# Altium PCB Sensor_Motor.PcbDoc
Units mm, origin at the board's own origin, x right, y up, seen from the top; angles counter-clockwise.
Board outline 45 x 45 mm, 2 copper layers (Top Layer, Bottom Layer); 35 components, 21 nets, 84 pads, 6 vias.
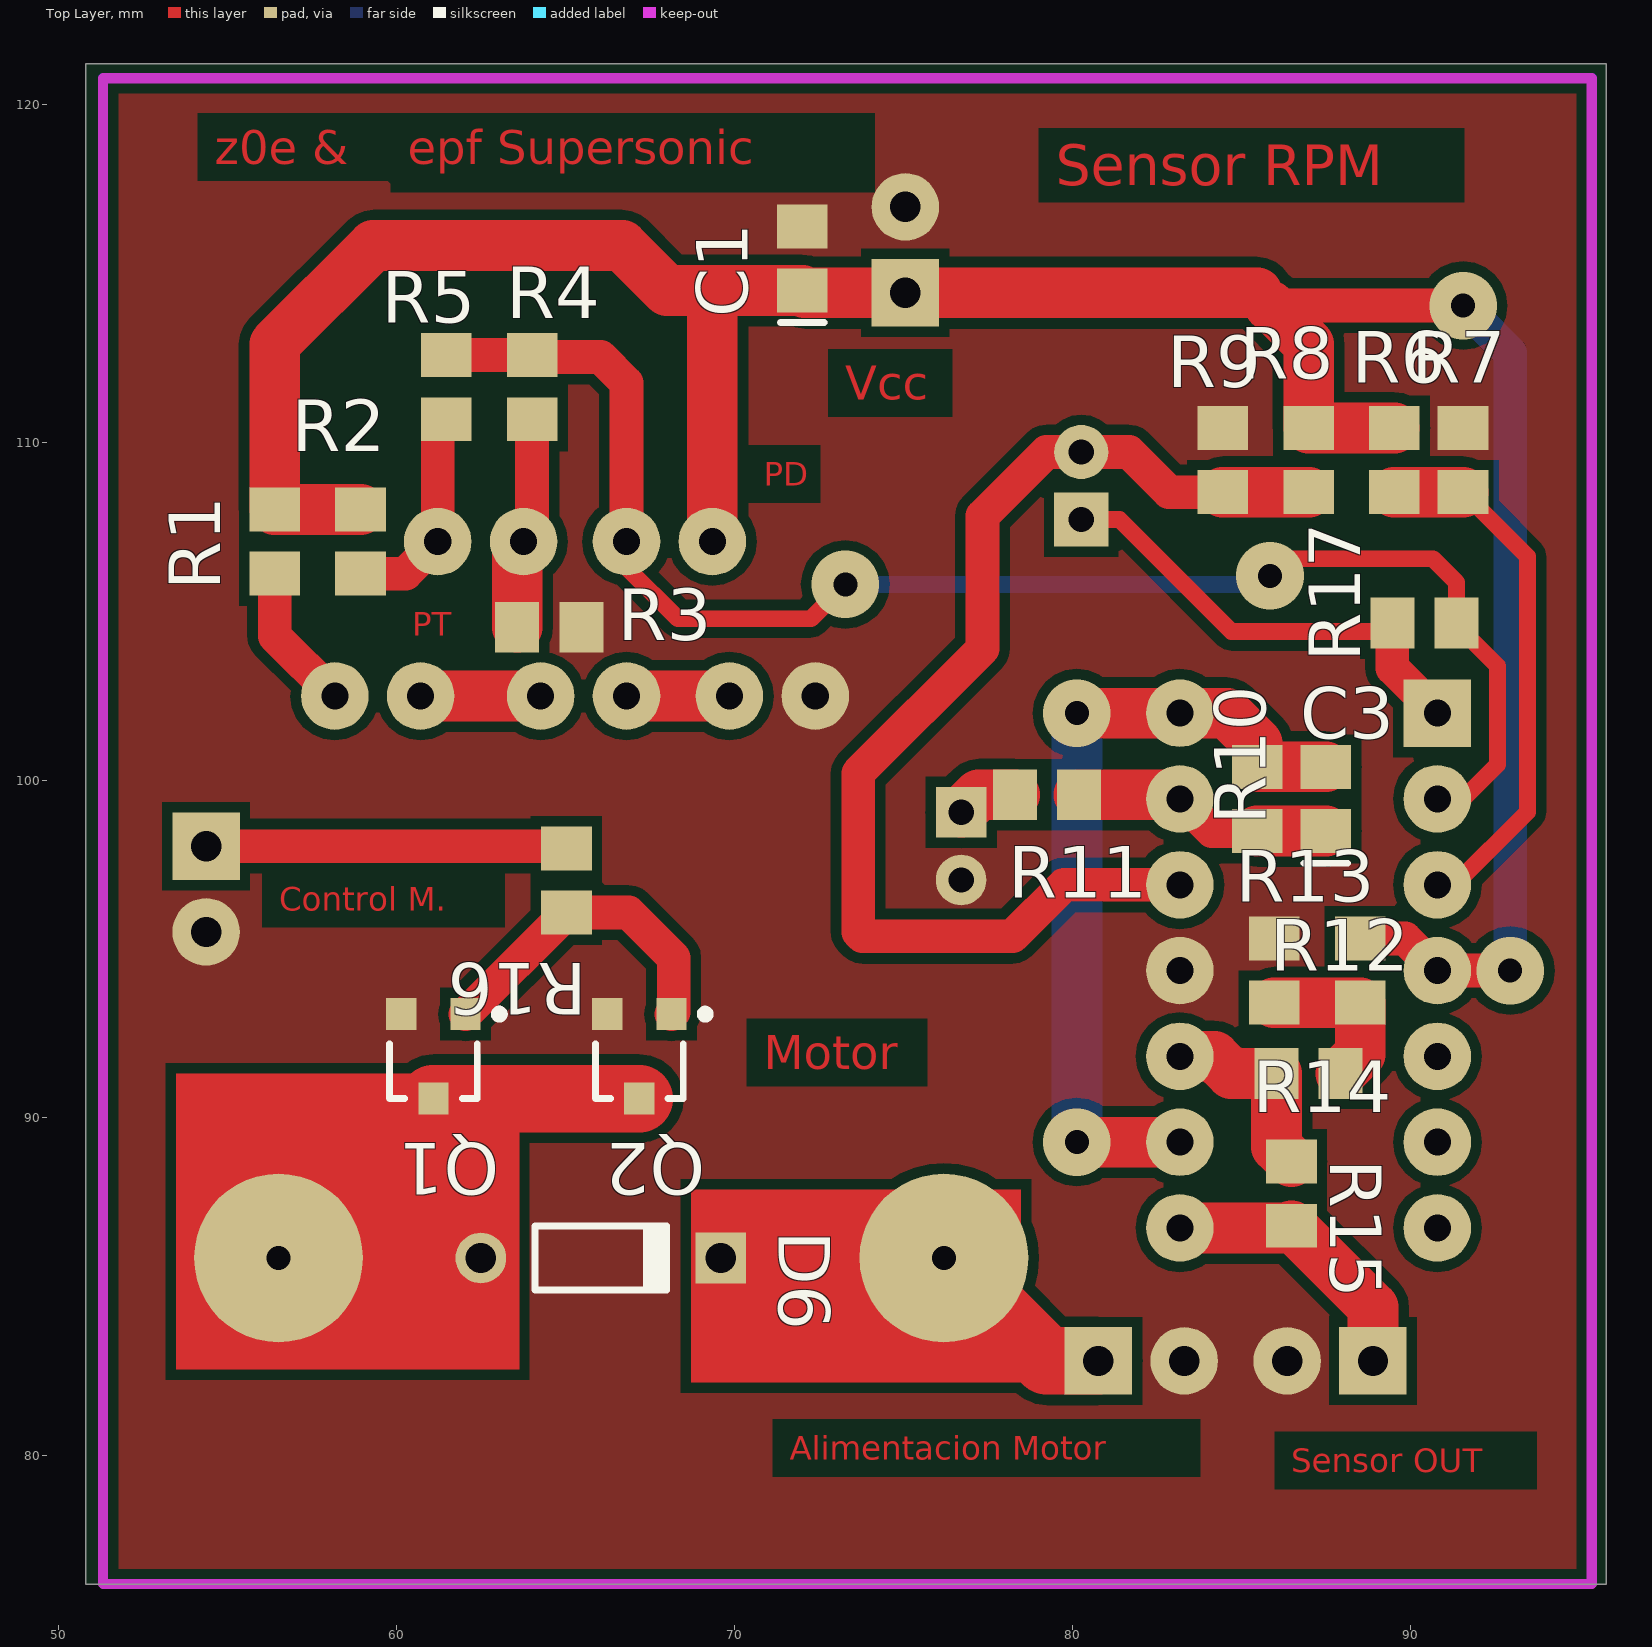
[diagram p0: Top Layer view]
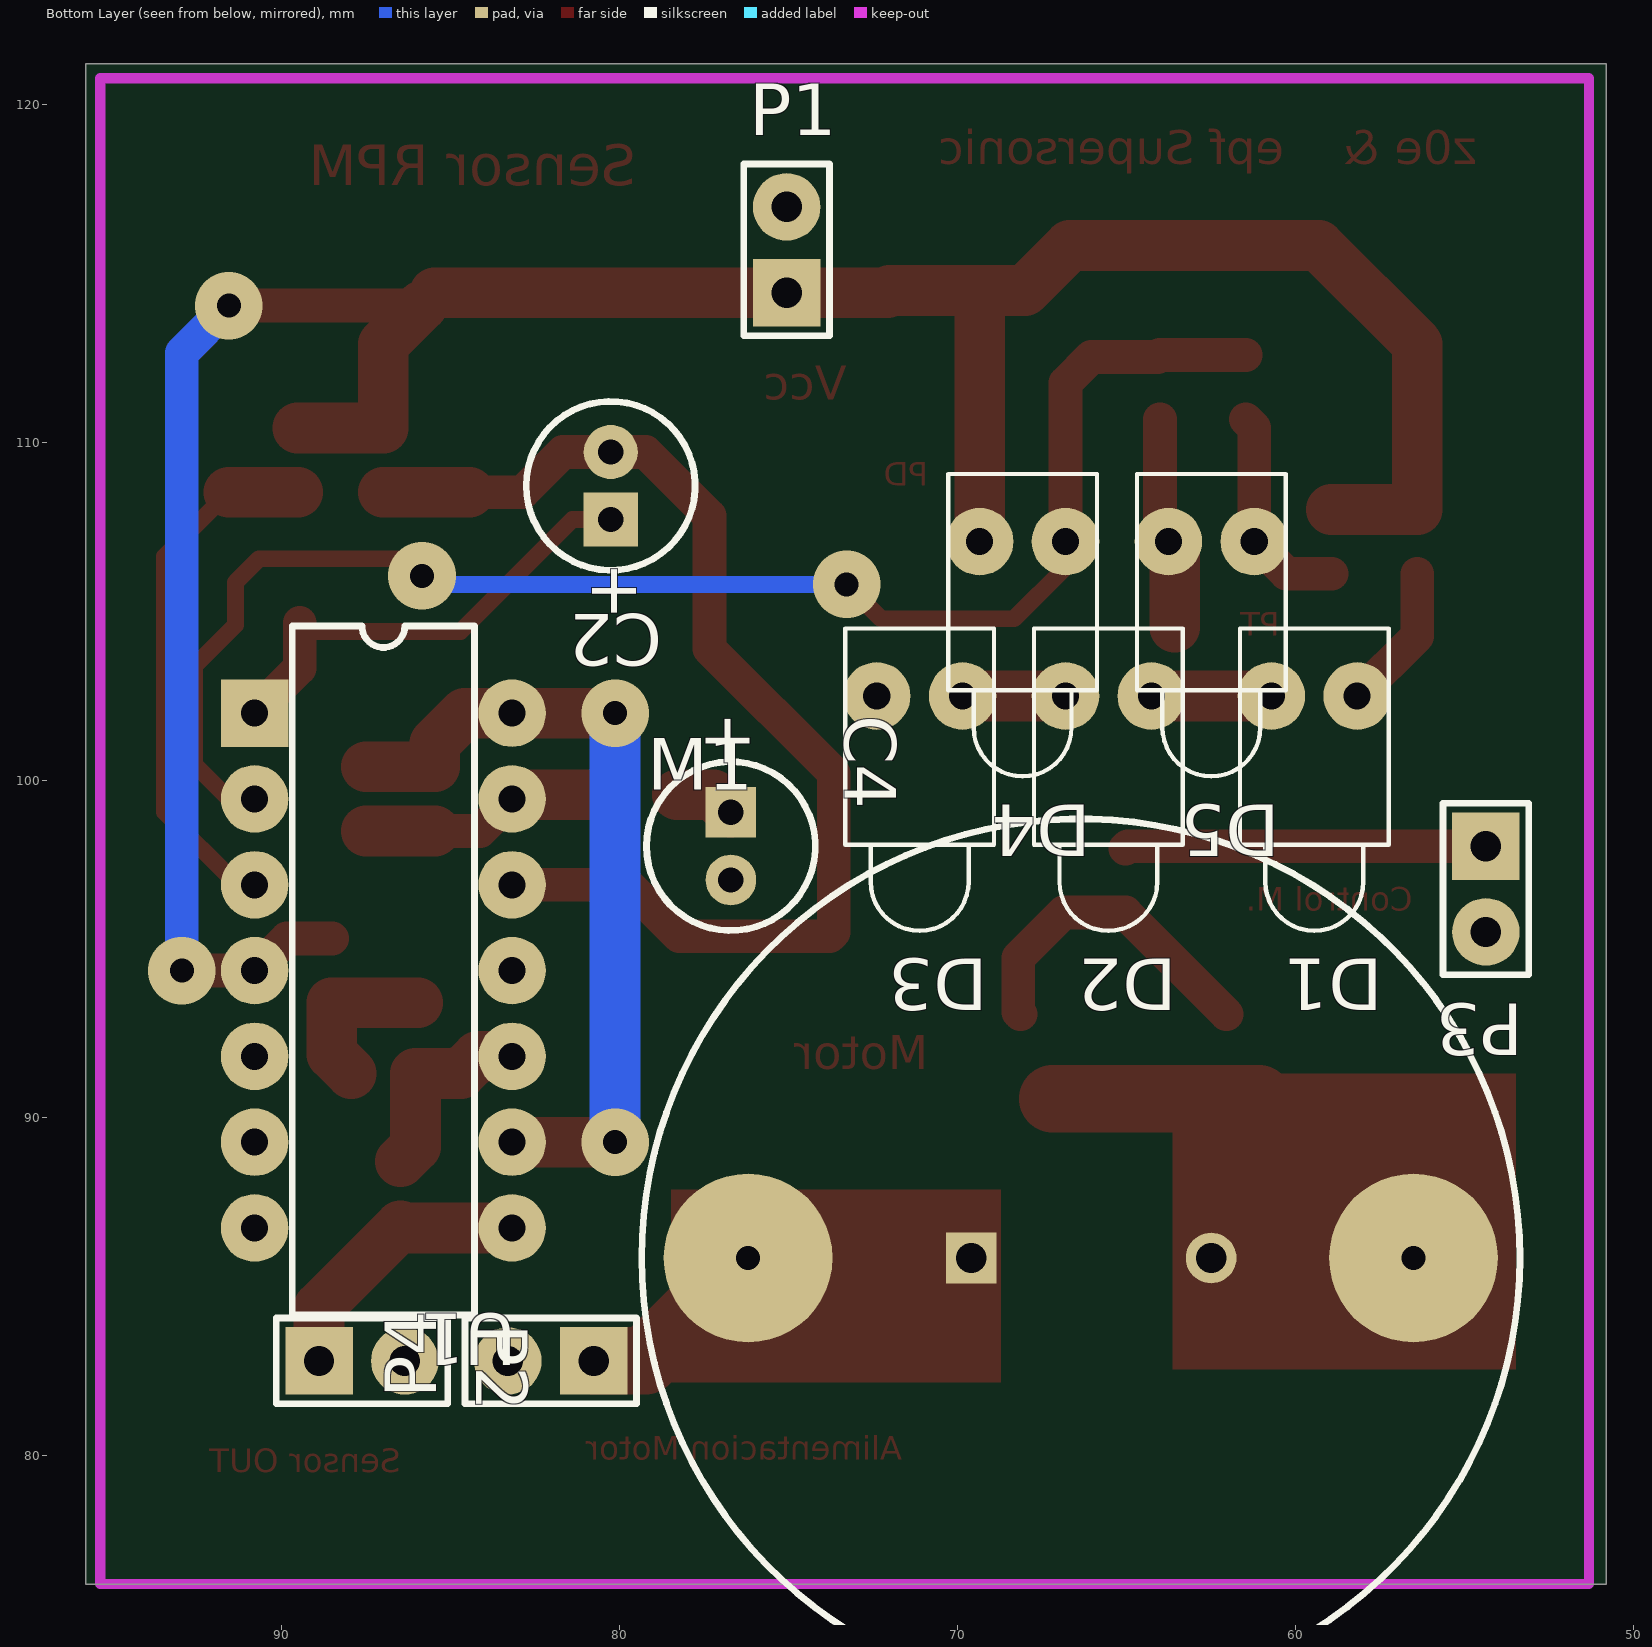
[diagram p1: Bottom Layer view, seen from below]

## Layer stack, top to bottom
Top Layer: signal copper 0.0356
Dielectric: dielectric 0.32, FR-4, Dk 4.8
Bottom Layer: signal copper 0.0356

## Board outline
50.8,76.2 95.8,76.2 95.8,121.2 50.8,121.2

## Design rules (kind name [scope] priority, off if disabled: settings)
Clearance [All] p1: gap=0.3
ComponentClearance [All] p1: gap=0.254 collisioncheckmode=3 verticalgap=0.254
PolygonConnect [All] p1: connectstyle=Direct reliefconductorwidth=0.254 reliefentries=4 polygonreliefangle="90 Angle"
RoomDefinition SensorRPM [InComponentClass('SensorRPM')] p1: confinementstyle=ConfineIn formatcopy=TRUE lockcomponents=TRUE outline 47.625,62.484 96.774,62.484 96.774,123.825 47.625,123.825
RoutingVias [All] p1: holewidth=0.8 width=2 viastyle="Through Hole" minholewidth=0.711 minwidth=1.27 maxholewidth=2 maxwidth=3
SolderMaskExpansion [All] p1: expansion=0.102
TestPointUsage [All] p1: valid=0 allowmultiple=FALSE
Testpoint [All] p1: side=15 testpointundercomponent=TRUE minsize=1.016 maxsize=2.54 preferedsize=1.524 minholesize=0 maxholesize=1.016 preferedholesize=0.813 testpointgrid=0.025 style=1023 order=0-112345678
Width [All] p1: maxlimit=3 minlimit=0.3 preferedwidth=1
18 further rules are at their usual default settings.

## Components (designator, comment, footprint, x,y, rotation, side; value= is the part's Value field where it differs from the comment)
C1 "Cap Pol3" C0805 72.009,115.443 r90 top
C2 "Cap Pol1" B#1 80.264,108.712 r90 bottom
C3 "Cap Pol3" C0805 87.503,99.441 r90 top
C4 "Cap Pol1" B#2 76.708,98.044 r270 bottom
D1 "LED1" LED-1 59.436,102.489 r270 bottom
D2 "LED1" LED-1 65.532,102.489 r270 bottom
D3 "LED1" LED-1 71.12,102.489 r270 bottom
D4 "LED1" LED-1 68.072,107.061 r270 bottom
D5 "LED1" LED-1 62.484,107.061 r270 bottom
D6 "Diode 1N4148" DO-35 66.04,85.852 r0 top
M1 "Motor" Motor1 76.2,85.852 r180 bottom
P1 "Header 2" HDR1X2 75.057,114.427 r90 bottom
P2 "Header 2" HDR1X2 88.9,82.804 r180 bottom
P3 "Header 2" HDR1X2 54.356,98.044 r270 bottom
P4 "Header 2" HDR1X2 80.772,82.804 r0 bottom
Q1 "QNPN" SOT-23B 61.087,91.821 r180 top
Q2 "QNPN" SOT-23B 67.183,91.821 r180 top
R1 "Res Semi" 2012[0805] 56.388,107.061 r90 top
R2 "Res Semi" 2012[0805] 58.928,107.061 r90 top
R3 "Res Semi" 2012[0805] 64.516,104.521 r180 top
R4 "Res Semi" 2012[0805] 61.468,111.633 r270 top
R5 "Res Semi" 2012[0805] 64.008,111.633 r270 top
R6 "Res Semi" 2012[0805] 89.535,109.474 r90 top
R7 "Res Semi" 2012[0805] 91.567,109.474 r90 top
R8 "Res Semi" 2012[0805] 86.995,109.474 r90 top
R9 "Res Semi" 2012[0805] 84.455,109.474 r270 top
R10 "Res Semi" 2012[0805] 85.471,99.441 r90 top
R11 "Res Semi" 2012[0805] 79.248,99.568 r0 top
R12 "Res Semi" 2012[0805] 88.519,94.361 r270 top
R13 "Res Semi" 2012[0805] 85.979,94.361 r90 top
R14 "Res Semi" 2012[0805] 86.995,91.313 r180 top
R15 "Res Semi" 2012[0805] 86.487,87.757 r270 top
R16 "Res Semi" 2012[0805] 65.024,97.028 r270 top
R17 "Res Semi" 2012[0805] 90.424,104.648 r180 top
U1 "TL084ACJ" 632-08 86.995,94.361 r270 bottom

## Footprints (in the part's own frame and the unit in brackets; to place one, negate y for a bottom-side part, rotate by r counter-clockwise, add the part's x,y. Pads: shape width x height; smd on the part's side, far side on the other; paste and mask are expansions set on the pad)
632-08 [mm] "DIP; 14 Leads; Row Spacing 7.62 mm; Pitch 2.54 mm"
  rect 2x2 hole 0.8: 1(-7.62,-3.81)
  round 2 hole 0.8: 2(-5.08,-3.81) 3(-2.54,-3.81) 4(0,-3.81) 5(2.54,-3.81) 6(5.08,-3.81) 7(7.62,-3.81) 8(7.62,3.81) 9(5.08,3.81) 10(2.54,3.81) 11(0,3.81) 12(-2.54,3.81) 13(-5.08,3.81) 14(-7.62,3.81)
  silkscreen extent -10.2,-2.7 10.2,2.7
2012[0805] [mm] "Chip Resistor; Body 2.0 x 1.3 mm (LxW typ)"
  rect 1.3x1.5 smd: 1(-0.95,0) 2(0.95,0)
B#1 [mm] "Capacitor, Electrolytic, Radial; Body 5 x 6.8 mm (Dia.xH typ); Pin Spacing 2 mm (typ)"
  rect 1.6x1.6 hole 0.75: 1(-1,0)
  round 1.6 hole 0.75: 2(1,0)
  silkscreen extent -2.5,-2.5 2.5,2.5
B#2 [mm] "Capacitor, Electrolytic, Radial; Body 5 x 6.8 mm (Dia.xH typ); Pin Spacing 2 mm (typ)"
  rect 1.5x1.5 hole 0.75: 1(-1,0)
  round 1.5 hole 0.75: 2(1,0)
  silkscreen extent -2.5,-2.5 2.5,2.5
C0805 [mm] "Chip Capacitor; Body 2.0 x 1.2 mm (LxW typ)"
  rect 1.3x1.5 smd: 1(-0.95,0) 2(0.95,0)
  silkscreen extent -1.9,-0.65 -1.9,0.65
DO-35 [mm] "Diode, Axial; Body 3.8 x 1.9 mm (LxDia. max), Lead Dia. 0.53 mm (max)"
  round 1.5 hole 0.9: 1(-3.55,0)
  rect 1.5x1.5 hole 0.9: 2(3.55,0)
  silkscreen extent -1.95,-0.95 2.05,0.95
HDR1X2 [mm] "Connector; Header; 2 Position"
  rect 2x2 hole 0.9: 1(0,0)
  round 2 hole 0.9: 2(2.54,0)
  silkscreen extent -1.27,-1.27 3.81,1.27
LED-1 [mm] "Typical RED GaAs LED; 2 Leads"
  round 2 hole 0.8: 1(0,1.27) 2(0,-1.27)
  silkscreen extent -2,-2.2 6.95,2.2
Motor1 [mm]
  round 5 hole 0.7: 1(0,0) 2(19.7,0)
  silkscreen extent -3.15,-13 22.85,13
SOT-23B [mm] "SOT-23; 3 Leads; Body 3.0 x 2.6 mm, inc. leads (LxW max)"
  rect 0.9x0.95 smd: 1(-0.95,-1.25) 2(0.95,-1.25) 3(0,1.25)
  silkscreen extent -2.08,-1.37 1.3,1.25

## Part data
C1 C3: "Polarized Capacitor (Surface Mount)"
C2 C4: "Polarized Capacitor (Radial)"
D1 D2 D3 D4 D5: "Typical RED GaAs LED"
D6: "High Conductance Fast Diode"
P1 P2 P3 P4: "Header, 2-Pin"
Q1 Q2: "NPN Bipolar Transistor"
R1 R2 R3 R4 R5 R6 R7 R8 R9 R10 R11 R12 R13 R14 R15 R16 R17: "Semiconductor Resistor"
U1: "JFET-Input Operational Amplifier"

## Via types
v1: diameter 2, hole 0.711, Top Layer to Bottom Layer, 6 vias

## Nets (pads, with @x,y where several pads share a name; then routed paths per layer and width w, separated by ;. In a path a pad name is that pad's centre, name@x,y a point inside that pad or via, vN(x,y) a via of type N, cw(c..) or ccw(c..) an arc to the next point about the centre after c; other vN are vias at no path point)
GND: C1.2 C4.2 D3.2 P1.2 P2.2 P3.2 P4.2 Q1.2 Q2.2 R3.1 R7.2 R9.1 R13.2 U1.11
NetC2_1: C2.1 R17.2 U1.1 | length 14.1
  Top Layer w0.5: C2.1 81.391,107.712 84.709,104.394 R17.2@89.474,104.394
  Top Layer w1: R17.2 89.474,103.312 U1.1
  Top Layer w1.5: U1.1@90.617,102.169 U1.1
NetC2_2: C2.2 R8.1 R9.2 U1.12 | length 35
  Top Layer w1: U1.12 79.756,96.901 78.232,95.377 73.787,95.377 73.66,95.504 73.66,100.203 77.343,103.886 77.343,107.823 79.232,109.712 81.677,109.712 82.865,108.524 R9.2
  Top Layer w1.5: R9.2 R8.1
NetC3_1: C3.1 R10.1 R11.2 U1.13 | length 7.8
  Top Layer w1: U1.13 84.135,98.491 R10.1
  Top Layer w1.5: R11.2 83.058,99.568 U1.13 ; R10.1 C3.1
NetC3_2: C3.2 R10.2 U1.9 U1.14 | length 24.2
  Top Layer w1.5: v1(80.137,89.281) U1.9 ; v1(80.137,101.981) 84.582,101.981 85.471,101.092 R10.2 C3.2
  Bottom Layer w1.5: v1(80.137,89.281) v1(80.137,101.981)
NetC4_1: C4.1 R11.1 | length 1.8
  Top Layer w1.5: C4.1 77.232,99.568 R11.1
NetD1_1: D1.1 R1.1 | length 4.4
  Top Layer w1: R1.1 56.388,104.267 D1.1
NetD1_2: D1.2 D2.1 | length 3.6
  Top Layer w1.5: D1.2 D2.1
NetD2_2: D2.2 D3.1 | length 3
  Top Layer w1.5: D2.2 D3.1
NetD4_1: D4.1 R4.1 R5.1 R17.1 U1.2 | length 45.5
  Top Layer w0.5: D4.1 66.802,106.299 68.326,104.775 72.263,104.775 v1(73.279,105.791) ; v1(85.852,106.045) 86.36,106.553 90.678,106.553 91.374,105.857 91.374,104.587 92.583,103.378 92.583,100.457 91.694,99.568 91.567,99.441 U1.2
  Top Layer w1: R4.1 R5.1 64.069,112.522 66.04,112.522 66.802,111.76 D4.1
  Bottom Layer w0.5: v1(73.279,105.791) 85.598,105.791 v1(85.852,106.045)
NetD5_1: D5.1 R2.1 R4.2 | length 6.4
  Top Layer w1: R2.1 60.264,106.111 D5.1 61.214,110.429 R4.2
NetD5_2: D5.2 R3.2 R5.2 | length 6.3
  Top Layer w1: D5.2 64.008,107.315 R5.2
  Top Layer w1.5: R3.2 63.566,106.873 D5.2
NetD6_1: D6.1 M1.2 Q1.3 Q2.3 | length 12.7
  Top Layer w2: M1.2 61.087,90.439 Q1.3 Q2.3
NetD6_2: D6.2 M1.1 P4.1 | length 6
  Top Layer w2: M1.1@76.073,85.979 79.248,82.804 P4.1
NetP2_1: P2.1 R15.2 U1.8 | length 8.3
  Top Layer w1.5: U1.8 86.421,86.741 R15.2 88.9,84.394 P2.1
NetP3_1: P3.1 R16.1 | length 10.7
  Top Layer w1: P3.1 64.958,98.044 R16.1
NetQ1_2: Q1.1 Q2.1 R16.2 | length 9.7
  Top Layer w1: Q1.1 65.024,96.058 R16.2 66.863,96.078 68.199,94.742 68.199,93.137 Q2.1
NetR6_1: R6.1 R7.1 U1.3 | length 15.8
  Top Layer w0.5: U1.3 91.313,96.901 93.472,99.06 93.472,106.619 R7.1
  Top Layer w1.5: R6.1 R7.1
NetR12_2: R12.2 R13.1 R14.1 | length 4.9
  Top Layer w1.5: R13.1 R12.2 88.519,91.887 R14.1
NetR14_2: R14.2 R15.1 U1.10 | length 5.9
  Top Layer w1.5: U1.10 84.201,91.821 84.709,91.313 R14.2 86.045,89.149 R15.1
VCC: C1.1 D4.2 P1.1 R1.2 R2.2 R6.2 R8.2 R12.1 U1.4 | length 83.7
  Top Layer w1: 85.471,114.427 85.852,114.046 v1(91.567,114.046) ; R12.1 89.855,95.311 U1.4 v1(92.964,94.361)
  Top Layer w1.5: R2.2 R1.2 56.388,112.903 59.309,115.824 66.675,115.824 68.006,114.493 C1.1 72.075,114.427 85.471,114.427 ; D4.2 69.342,114.493 ; 85.852,114.046 86.995,112.903 R8.2 R6.2
  Bottom Layer w1: v1(91.567,114.046) 92.964,112.649 v1(92.964,94.361)
pads on no net: U1.5 U1.6 U1.7

## Polygon pours and split planes (outlines as drawn)
GND on Top Layer (solid, remove dead copper): 50.165,121.92 50.165,74.93 96.266,74.93 96.266,122.174

## Keep-outs
Keep-Out Layer:
  lines w0.3: 51.308,76.2 95.377,76.2 95.377,120.777 51.308,120.777 51.308,76.2

## Other copper
Top Layer:
  rectangle net NetD6_1: 53.467,82.55 63.627,91.313
  rectangle net NetD6_2: 68.707,82.169 78.486,87.884
  text "z0e &" at 54.61,118.237 h1
  text "epf Supersonic" at 60.325,118.237 h1
  text "Sensor RPM" at 79.502,117.602 h1.2
  text "Vcc" at 73.279,111.252 h1
  text "PD" at 70.866,108.712 h0.7
  text "PT" at 60.452,104.267 h0.7
  text "Control M." at 56.515,96.139 h0.7
  text "Motor" at 70.866,91.44 h1
  text "Alimentacion Motor" at 71.628,79.883 h0.7
  text "Sensor OUT" at 86.487,79.502 h0.7

## Silkscreen, mask and mechanical layers (free items; w line width, h text height)
Drill Drawing:
  text ".LEGEND" at 100.88,81.28 h1.52
  text "Drill Drawing." at 100.88,78.74 h1.52

## Dimensions
51.308,76.2 to 95.377,76.2 on Mechanical 1
51.308,76.2 to 51.308,120.777 on Mechanical 1

## Text inside footprints (layer, text, board x,y; h text height)
C2: Bottom Overlay "+" at 79.514,104.737 h1.5 r270
C4: Bottom Overlay "+" at 77.458,102.019 h1.5 r90